# Altium PCB Shield.PcbDoc
Units mm, origin at the board's own origin, x right, y up, seen from the top; angles counter-clockwise.
Board outline 25.6 x 21.43 mm, 2 copper layers (Top Layer, Bottom Layer), stack 1.57 mm thick; 3 components, 5 nets, 26 pads, 0 vias.
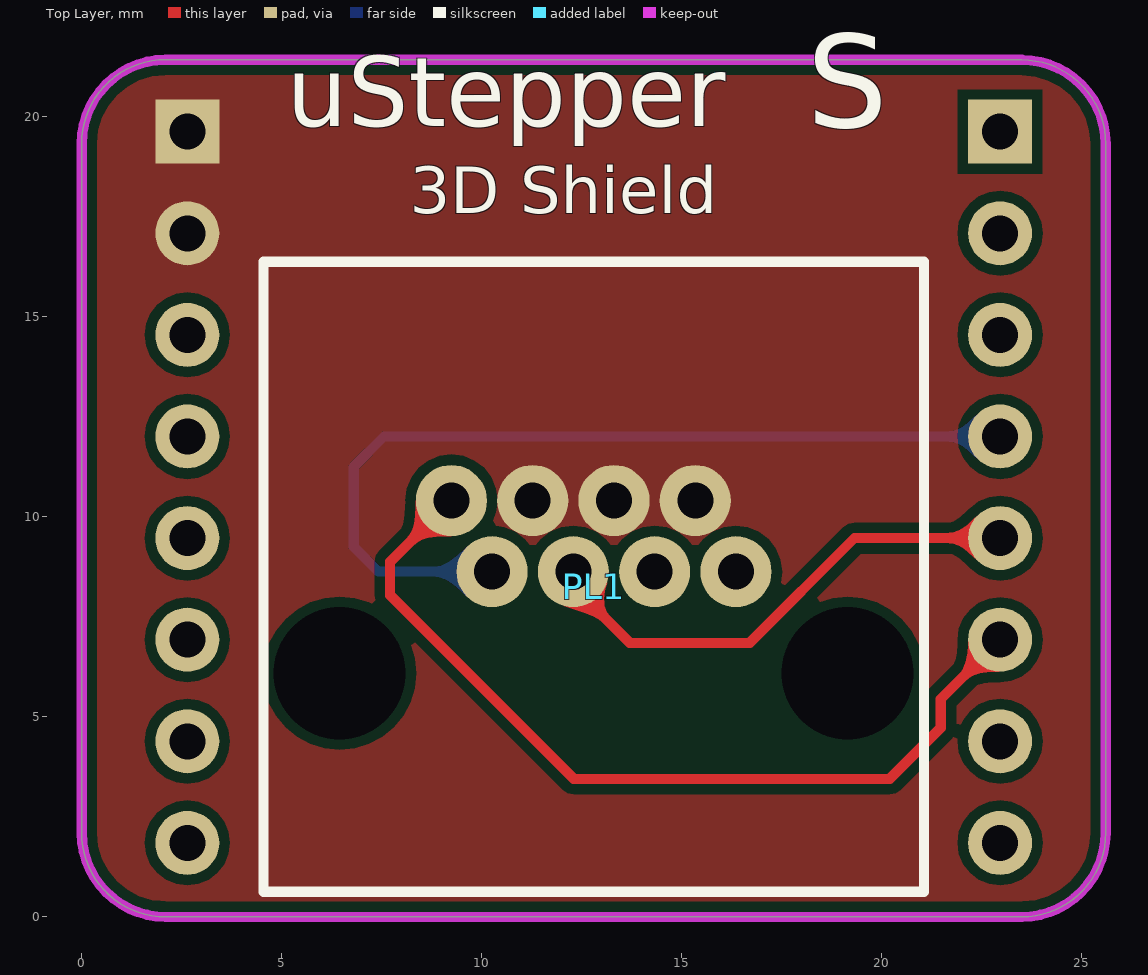
[diagram p0: Top Layer view]
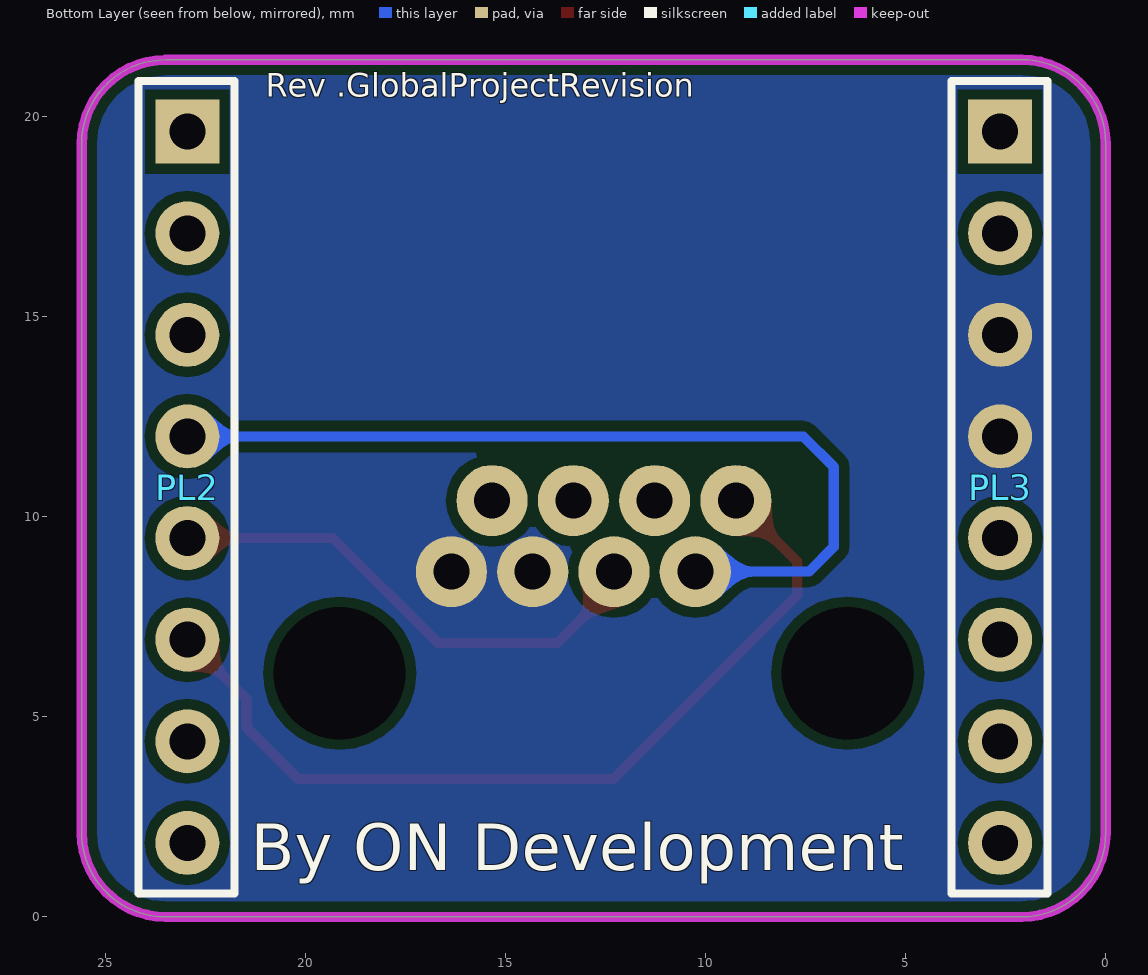
[diagram p1: Bottom Layer view, seen from below]

## Layer stack, top to bottom
Top Solder: solder mask 0.0102, Solder Resist, Dk 3.5
Top Layer: signal copper 0.035
Dielectric 1: dielectric 1.5, FR-4, Dk 4.8
Bottom Layer: signal copper 0.035
Bottom Solder: solder mask 0.0102, Solder Resist, Dk 3.5

## Board outline
0,2.1 ccw(c2.1,2.1) 2.1,0 23.5,0 ccw(c23.5,2.1) 25.6,2.1 25.6,19.325 ccw(c23.5,19.325) 23.5,21.425 23.5,21.43 2.1,21.43 ccw(c2.1,19.33) 0,19.33

## Design rules (kind name [scope] priority, off if disabled: settings)
Clearance [All] p1: gap=0.254 ignorepadtopadclearanceinfootprint=FALSE except(0: Arc-Arc Arc-Hole Track-Hole SMDPad-Hole THPad-Hole Via-Hole Fill-Hole Poly-Hole Region-Hole Text-Hole)
ComponentClearance [All] p1: gap=0 collisioncheckmode=3 verticalgap=0 showdistances=FALSE
PolygonConnect [All] p1: connectstyle=Direct reliefconductorwidth=0.254 reliefentries=4 polygonreliefangle="90 Angle" airgapwidth=0.254
RoutingVias [All] p1: holewidth=0.711 width=1.27 viastyle="Through Hole" minholewidth=0.711 minwidth=1.27 maxholewidth=0.711 maxwidth=1.27
SolderMaskExpansion [All] p1: expansion=0.102
Width [All] p1: maxlimit=0.254 minlimit=0.254 preferedwidth=0.254
29 further rules are at their usual default settings.

## Components (designator, comment, footprint, x,y, rotation, side; value= is the part's Value field where it differs from the comment)
PL1 "RJHSE-5080" "AMPHENOL RJHSE-5080" 12.8,8.25 r0 top
PL2 "8-pin Male Header 2.54mm" "8-pin 2.54mm header" 22.96,10.74 r270 bottom
PL3 "8-pin Male Header 2.54mm" "8-pin 2.54mm header" 2.64,10.74 r270 bottom

## Footprints (in the part's own frame and the unit in brackets; to place one, negate y for a bottom-side part, rotate by r counter-clockwise, add the part's x,y. Pads: shape width x height; smd on the part's side, far side on the other; paste and mask are expansions set on the pad)
"8-pin 2.54mm header" [mm]
  rect 1.6x1.6 hole 0.9: 1(-8.89,0)
  round 1.6 hole 0.9: 2(-6.35,0) 3(-3.81,0) 4(-1.27,0) 5(1.27,0) 6(3.81,0) 7(6.35,0) 8(8.89,0)
  silkscreen extent -10.16,-1.22 10.16,1.18, body extent -10.16,-1.24 10.16,1.25, height 15
"AMPHENOL RJHSE-5080" [mil] "RJ45 connector"
  round 0 hole 130 unplated: 0(-250,-85) 0(250,-85)
  round 70 hole 35.43: 1(140,15) 2(100,85) 3(60,15) 4(20,85) 5(-20,15) 6(-60,85) 7(-100,15) 8(-140,85)
  silkscreen extent -325,-300 325,320, body extent -310,-286 310,304, height 521

## Part data
PL1: library part CMP-003-0022-0.1, "CONN MOD JACK 8P8C R/A UNSHLD", Colour=Black, Contact Resistance=20mR, Current Rating=1.5A, Flammability Rating="UL94 V-0", Max Operating Temperature=85°C, Max Voltage Rating (AC)=125V, Min Operating Temperature=-55°C, Package Quantity=36, Connector Type="Jack, RJ45", Contact Material=Bronze, Contact Plating=Gold, Depth=14.99mm, Direction=Up, Gender=Female, Housing Material=Thermoplastic, Lead Free="Lead Free", Length=15.75mm, Max Current Rating=1.5A, Mount="Panel, Through Hole", Number of Contacts=8, Number of Ports=1, Number of Positions=8, Number of Positions Loaded=8, Number of Rows=1, Orientation="Right Angle", Packaging=Tray, Pitch=2.03mm, Radiation Hardening=No, REACH SVHC=Unknown, Shielding=Unshielded, Termination=Solder, Voltage Rating=125V, Voltage Rating (DC)=125V
PL2 PL3: library part CMP-003-0009-0.3

## Nets (pads, with @x,y where several pads share a name; then routed paths per layer and width w, separated by ;. In a path a pad name is that pad's centre, name@x,y a point inside that pad or via, vN(x,y) a via of type N, cw(c..) or ccw(c..) an arc to the next point about the centre after c; other vN are vias at no path point)
DIR: PL1.7 PL2.4 | length 22.2
  Bottom Layer w0.254: PL1.7 7.419,8.631 6.8,9.25 6.8,11.25 7.56,12.01 PL2.4
ENA: PL1.8 PL2.6 | length 22.8
  Top Layer w0.254: PL1.8 7.712,8.877 7.712,8.038 12.3,3.45 20.2,3.45 21.475,4.725 21.475,5.445 PL2.6 ; PL2.6@23.4,6.65 PL2.6@23.4,6.93
  Bottom Layer w0.254: PL1.8 PL1.8@9.244,10.894
GND: PL1.2 PL1.4 PL1.6 PL3.1 PL3.2
STEP: PL1.5 PL2.5 | length 12.7
  Top Layer w0.254: PL1.5 12.292,8.258 13.7,6.85 16.7,6.85 19.32,9.47 PL2.5
VDD: PL1.1 PL1.3 PL3.3 PL3.4
pads on no net: PL1.0 PL2.1 PL2.2 PL2.3 PL2.7 PL2.8 PL3.5 PL3.6 PL3.7 PL3.8

## Polygon pours and split planes (outlines as drawn)
GND on Top Layer "Bottom Layer-No Net" (solid, remove dead copper, pour order 2): -1,22.75 26.6,22.75 26.6,-1.95 -1,-1.95
VDD on Bottom Layer "Bottom Layer-No Net" (solid, remove dead copper, pour order 4): -1,22.65 26.6,22.65 26.6,-1.65 -1,-1.65

## Keep-outs
Keep-Out Layer:
  lines w0.254: 23.5,21.425 cw(c23.5,19.325) 25.6,19.325 25.6,2.1 cw(c23.5,2.1) 23.5,0 2.1,0 cw(c2.1,2.1) 0,2.1 0,19.33 cw(c2.1,19.33) 2.1,21.43 23.5,21.43

## Silkscreen, mask and mechanical layers (free items; w line width, h text height)
Top Overlay:
  text "uStepper" at 5.131,19.191 h3
  text "S" at 18.131,18.984 h4
  text "3D Shield" at 8.2,17.2 h2
Bottom Overlay:
  text "Rev .GlobalProjectRevision" at 21,20.3 h1
  text "By ON Development" at 21.375,0.775 h2
Mechanical 1:
  lines w0.254: 23.5,21.425 cw(c23.5,19.325) 25.6,19.325 25.6,2.1 cw(c23.5,2.1) 23.5,0 2.1,0 cw(c2.1,2.1) 0,2.1 0,19.33 cw(c2.1,19.33) 2.1,21.43 23.5,21.43